# Altium PCB main_board.PcbDoc
Units mm, origin at the board's own origin, x right, y up, seen from the top; angles counter-clockwise.
Board outline 80.01 x 52.07 mm, 2 copper layers (Top Layer, Bottom Layer), stack 1.65 mm thick; 19 components, 14 nets, 64 pads, 2 vias.
Unrouted connection lines stored in the file: 2.
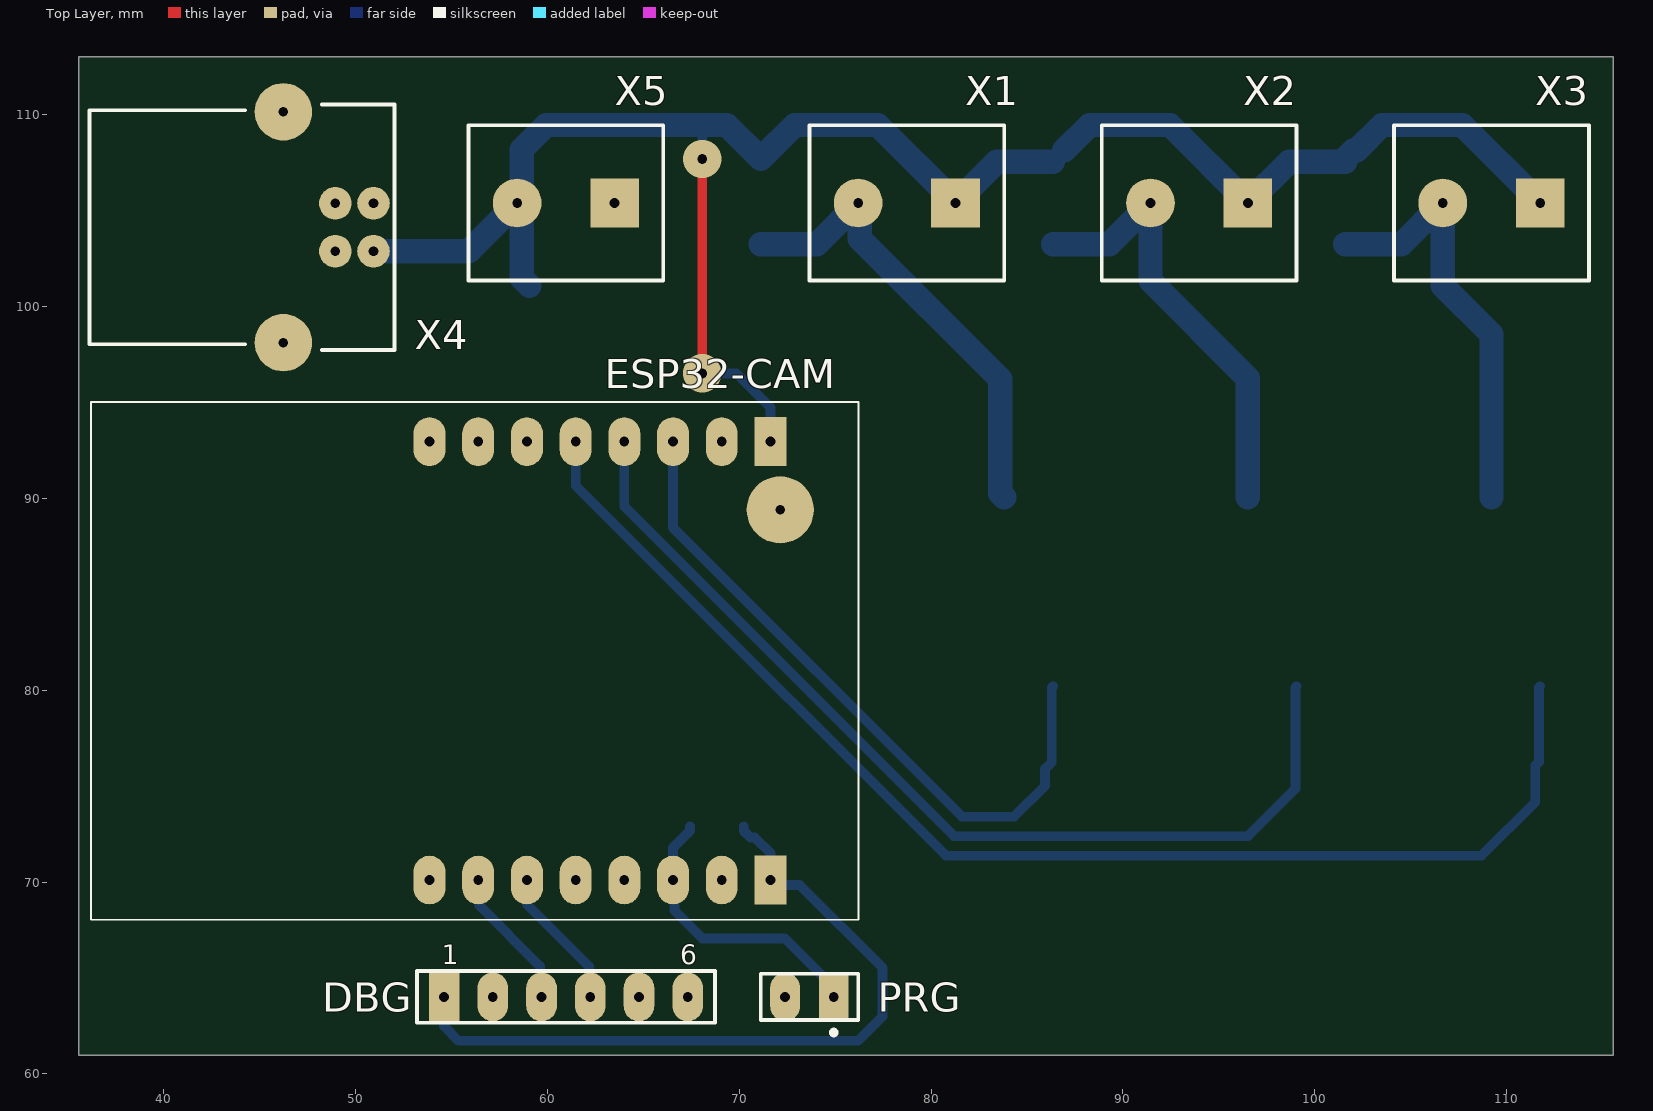
[diagram p0: Top Layer view]
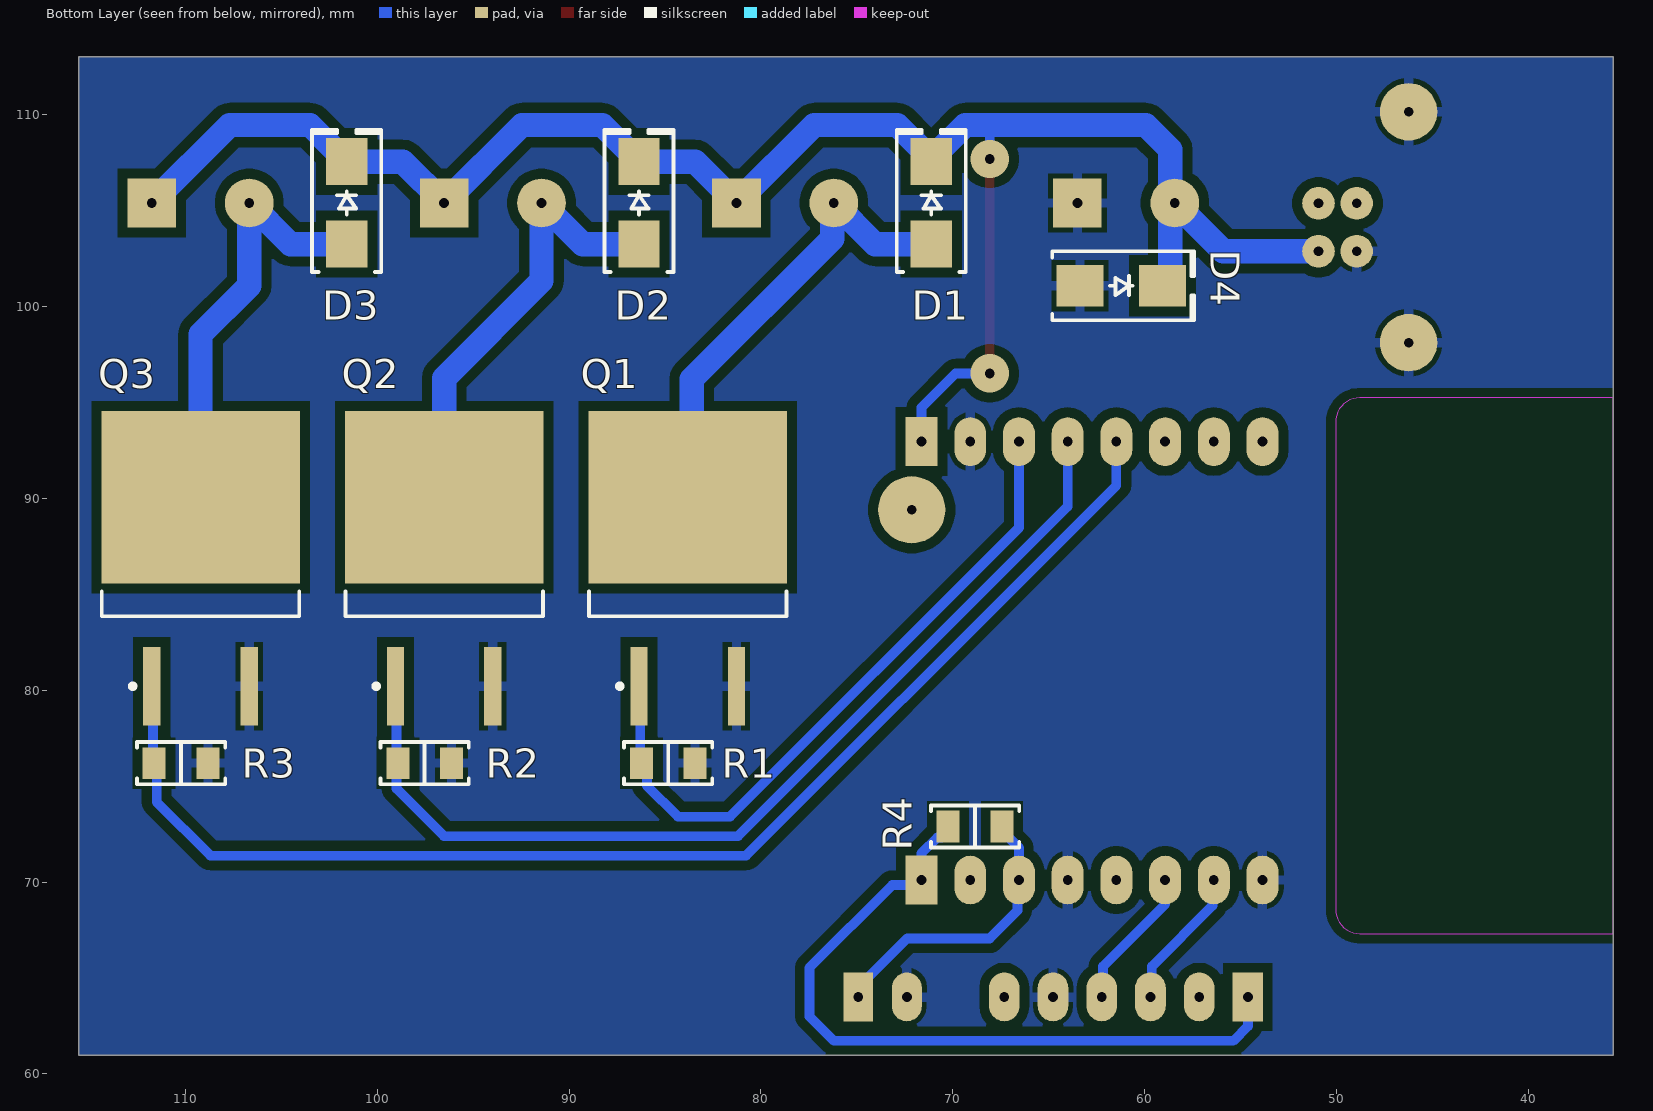
[diagram p1: Bottom Layer view, seen from below]
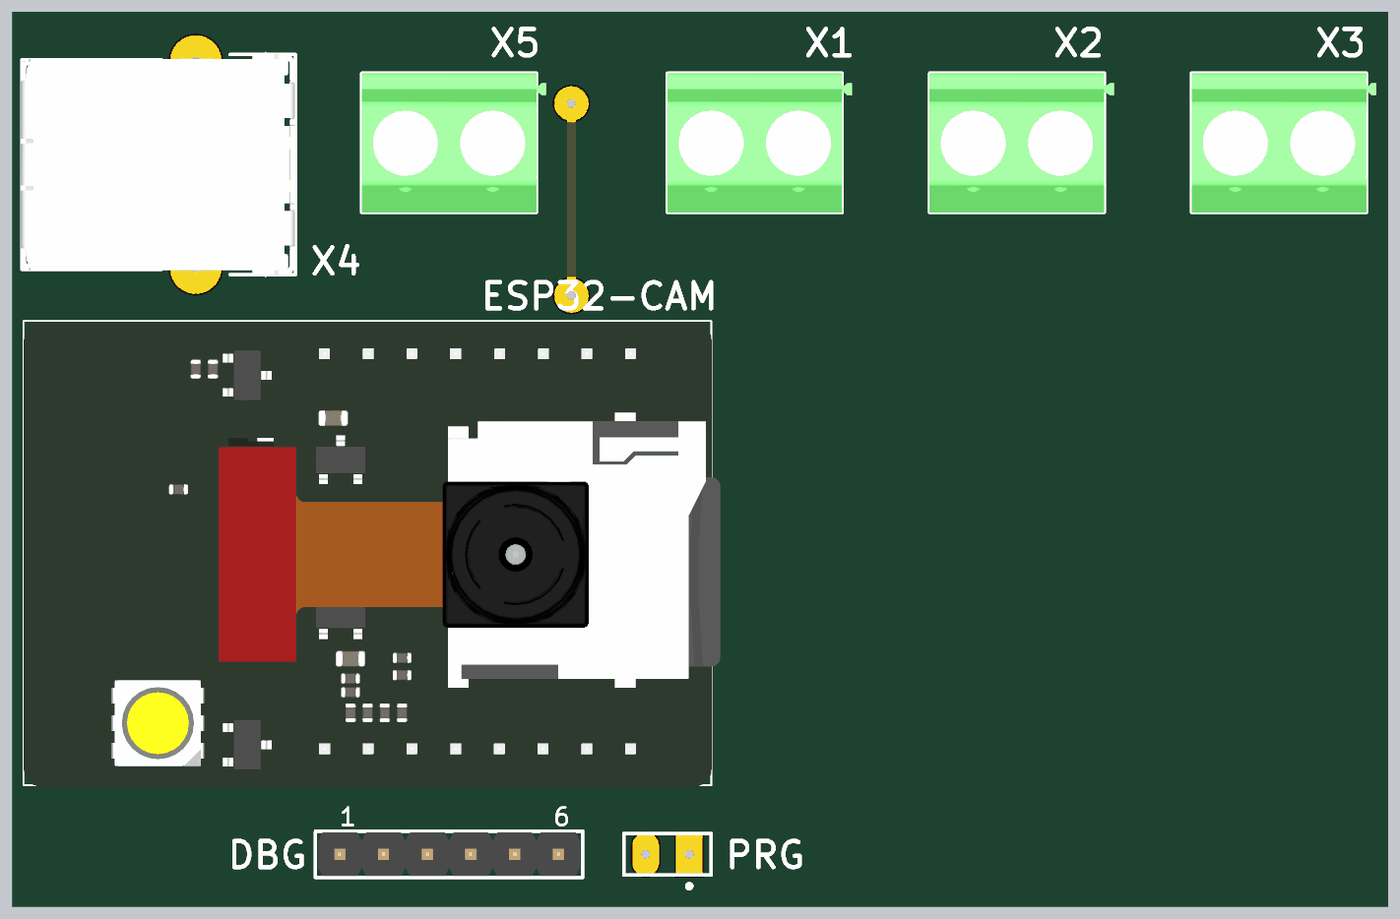
[diagram p2: 3D render of the assembled board from above, using the file's embedded part models]
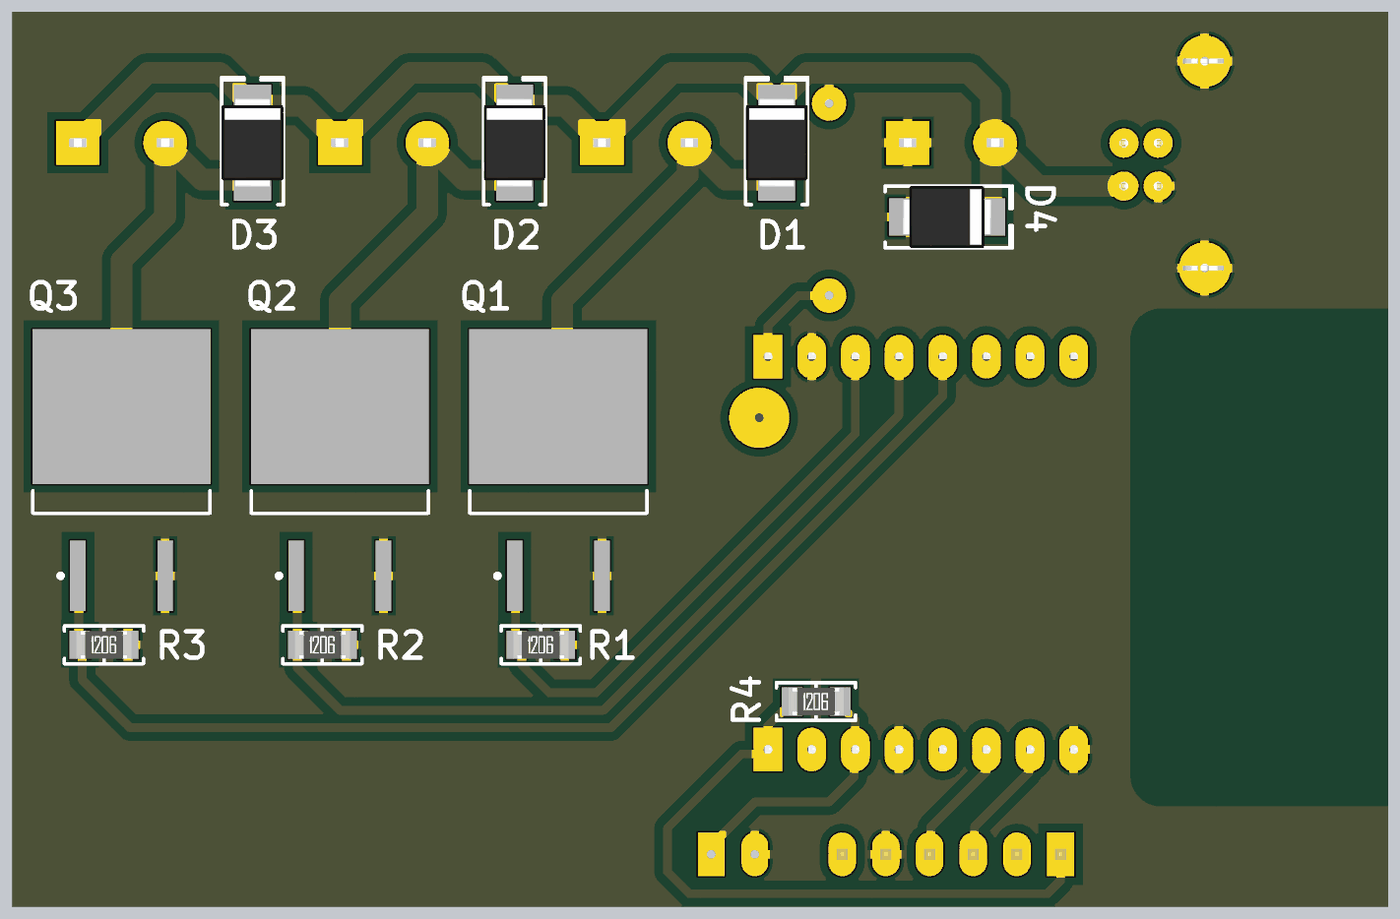
[diagram p3: 3D render of the assembled board from below, using the file's embedded part models]

## Layer stack, top to bottom
Top Solder: solder mask 0.0127, Solder Resist, Dk 3.8
Top Layer: signal copper 0.075
Dielectric: core 1.5, FR-4, Dk 4.5
Bottom Layer: signal copper 0.075
Bottom Solder: solder mask 0.0127, Solder Resist, Dk 3.8

## Board outline
35.56,60.96 115.57,60.96 115.57,113.03 35.56,113.03

## Design rules (kind name [scope] priority, off if disabled: settings)
Clearance [All] p1: gap=0.508 ignorepadtopadclearanceinfootprint=FALSE
PlaneConnect [All] p1: planeconnectstyle=Relief reliefexpansion=0.508 reliefentries=4 reliefconductorwidth=0.508 reliefairgap=0.254
PolygonConnect [All] p1: connectstyle=Relief reliefconductorwidth=0.508 reliefentries=4 polygonreliefangle="90 Angle" airgapwidth=0.254
RoutingVias [All] p1: holewidth=0.711 width=1.27 viastyle="Through Hole" minholewidth=0.711 minwidth=1.27 maxholewidth=0.711 maxwidth=1.27
SolderMaskExpansion [All] p1: expansion=0.102 istentingtop=FALSE
Width [All] p1: maxlimit=1.27 minlimit=0.254 preferedwidth=0.508
29 further rules are at their usual default settings.

## Components (designator, comment, footprint, x,y, rotation, side; value= is the part's Value field where it differs from the comment)
D1 "SK16-LTP" "DO214AA SMB" 71.12,105.41 r90 bottom
D2 "SK16-LTP" "DO214AA SMB" 86.36,105.41 r90 bottom
D3 "SK16-LTP" "DO214AA SMB" 101.6,105.41 r90 bottom
D4 "SK16-LTP" "DO214AA SMB" 61.214,101.092 r180 bottom
DBG "61300611121" 61300611121 60.96,64.008 r0 top
ESP32-CAM "113990580" 113990580 71.628,92.964 r270 top
PRG "68000-102HLF" AMPH-68000-102HLF_V 73.66,64.008 r180 top
Q1 "IPB065N03L G" INF-PG-TO-263-3-2_A_L 83.82,86.36 r90 bottom
Q2 "IPB065N03L G" INF-PG-TO-263-3-2_A_L 96.52,86.36 r90 bottom
Q3 "IPB065N03L G" INF-PG-TO-263-3-2_A_L 109.22,86.36 r90 bottom
R1 "10 kOhms" "RES 1206_3216" 84.836,76.2 r180 bottom
R2 "10 kOhms" "RES 1206_3216" 97.536,76.2 r180 bottom
R3 "10 kOhms" "RES 1206_3216" 110.236,76.2 r180 bottom
R4 "10 kOhms" "RES 1206_3216" 68.834,72.898 r180 bottom
X1 "1729128" PHOE-1729128-2_V 78.74,105.41 r180 top
X2 "1729128" PHOE-1729128-2_V 93.98,105.41 r180 top
X3 "1729128" PHOE-1729128-2_V 109.22,105.41 r180 top
X4 "61729-0010BLF" "FCI USB 61729-0010BLF" 46.228,104.14 r270 top
X5 "1729128" PHOE-1729128-2_V 60.96,105.41 r180 top

## Footprints (in the part's own frame and the unit in brackets; to place one, negate y for a bottom-side part, rotate by r counter-clockwise, add the part's x,y. Pads: shape width x height; smd on the part's side, far side on the other; paste and mask are expansions set on the pad)
113990580 [mm]
  rect 2.54x1.665 hole 0.508: 1(0,0) 9(22.86,0)
  oval 2.54x1.665 hole 0.508: 2(0,-2.54) 3(0,-5.08) 4(0,-7.62) 5(0,-10.16) 6(0,-12.7) 7(0,-15.24) 8(0,-17.78) 10(22.86,-2.54) 11(22.86,-5.08) 12(22.86,-7.62) 13(22.86,-10.16) 14(22.86,-12.7) 15(22.86,-15.24) 16(22.86,-17.78)
  silkscreen extent -2.07,-35.42 24.93,4.58, body extent -1.98,-35.4 25.02,5.1, height 18.07
61300611121 [mm] "Pin Header, pitch 2.54 mm, THT, Vertical, single row, 6p"
  rect 1.6x2.54 hole 0.508: 1(-6.35,0)
  oval 1.6x2.54 hole 0.508: 2(-3.81,0) 3(-1.27,0) 4(1.27,0) 5(3.81,0) 6(6.35,0)
  silkscreen extent -7.77,-1.35 7.77,1.35, body extent -7.62,-1.27 7.62,1.27, height 8.57
AMPH-68000-102HLF_V [mm] "THD, 2-Leads, Body 5.08x2.41mm, Pitch 2.54mm"
  rect 1.55x2.54 hole 0.508: 1(-1.27,0)
  oval 1.55x2.54 hole 0.508: 2(1.27,0)
  silkscreen extent -2.54,-1.2 2.54,1.98, body extent -2.54,-1.2 2.54,1.2, height 8.38
"DO214AA SMB" [mm] "Molded Diode, 2-Leads, Body 4.31x3.62mm, IPC Medium Density"
  rect 2.45x2.15 smd: 1(-2.15,0) 2(2.15,0)
  silkscreen extent -3.6,-1.8 3.8,1.8, body extent -2.6,-1.8 2.6,1.8, height 2.4
"FCI USB 61729-0010BLF" [mm]
  round 1.7 hole 0.508: 1(1.25,4.7) 2(-1.25,4.7) 3(-1.25,2.71) 4(1.25,2.71)
  round 3 hole 0.508: S(-6.02,0) S(6.02,0)
  silkscreen extent -6.4,-10.1 6.4,5.8, body extent -6.56,-10.18 6.56,5.76, height 11
INF-PG-TO-263-3-2_A_L [mm] "DPAK, 3-Leads, Body 10.06x8.98mm, Pitch 2.54mm, IPC High Density"
  rect 4.1x0.9 smd: 1(-6.15,2.54) 3(-6.15,-2.54)
  rect 9x10.35 smd: 2(3.7,0)
  silkscreen extent -6.27,-5.15 -1.2,5.15, body extent -2.5,-5.15 6.95,5.15, height 4.57
PHOE-1729128-2_V [mil] "Receptacle, 2-Leads, Body 8.1x10.16mm, Pitch 5.08mm"
  rect 100x100 hole 20: 1(-100,0)
  round 100 hole 20: 2(100,0)
  silkscreen extent -200,-159 200,159, body extent -222,-159 200,159, height 394
"RES 1206_3216" [mm] "Chip Resistor, 2-Leads, Body 3.13x1.55mm, IPC Medium Density"
  rect 1.2x1.65 smd: 1(-1.4,0) 2(1.4,0)
  silkscreen extent -2.3,-1.1 2.3,1.1, body extent -1.6,-0.8 1.6,0.8, height 0.6

## Part data
D1 D2 D3 D4: "DIODE SCHOTTKY 60V 1A DO214AA", Current - Average Rectified (Io)=1A, Current - Reverse Leakage @ Vr="500µA @ 60V", Manufacturer="Micro Commercial Co", Operating Temperature - Junction="-55°C ~ 125°C", Package / Case="DO-214AA, SMB", Supplier Device Package="DO-214AA (SMB)", Supplier Part Number 1=SK16-LTPMSCT-ND, Voltage - DC Reverse (Vr) (Max)=60V, Voltage - Forward (Vf) (Max) @ If="720mV @ 1A", ComponentLink1Description=Datasheet, ComponentLink1URL=https://www.mccsemi.com/pdf/Products/SK12-L~SK110-L(DO-214AA)-V1.pdf, ComponentLink2Description="DigiKey Link", ComponentLink2URL=http://digikey.com/product-detail/en/micro-commercial-co/SK16-LTP/SK16-LTPMSCT-ND/2642064, Diode Type=Schottky, LastUpdated="2.9.2020. 01:18:51", Lifecycle Status=Active, Minimum Order=1, Mounting Type="Surface Mount", Packaging=TapeAndReel, Part Number=SK16-LTP, Part Status=Active, PartId=1607, Price=0.07, Series=-, Speed="Fast Recovery =< 500ns, > 200mA (Io)", Supplier 1=DigiKey
DBG: library part CMP-1502-01070-1, "THT Vertical Pin Header WR-PHD, Pitch 2.54 mm, Single Row, 6 pins", Contact Resistance=20mOhm, Manufacturer="Wurth Elektronik", Operating Temperature=-40to105degC, Rated Current=3A, Withstanding Voltage=500VAC, Working Voltage=250VAC, Datasheet URL=https://katalog.we-online.de/em/datasheet/6130xx11121.pdf, Gender=Male, Manufacturer URL=http://www.we-online.de, Mounting Technology=THT, Orientation=Vertical, Package Reference=61300611121, Packaging=Bag, Part Number=61300611121, Pin Number=6, Pitch=2.54mm, Publisher=WurthElektronik, Row Number=Single
ESP32-CAM: "Integrated Circuit", Manufacturer_Name="Seeed Studio", Mouser Part Number=713-113990580, Arrow Part Number=113990580, Arrow Price/Stock=https://www.arrow.com/en/products/113990580/seeed-technology-limited, Datasheet Link=https://github.com/SeeedDocument/Outsourcing/raw/master/113990580%20ESP32-CAM/113990580%20ESP32-CAM%20Product%20Specification.pdf, Height=3mm, Manufacturer_Part_Number=113990580, Mouser Price/Stock=https://www.mouser.com/Search/Refine.aspx?Keyword=713-113990580
PRG: library part CMP-2000-05666-1, "Male Header, Pitch 2.54 mm, 1 x 2 Position, Height 8.38 mm, Tail Length 2.41 mm, RoHS, Bulk", Current Rating=3A, Flammability Rating=UL94V-0, Insulation Resistance=5000MOhms, Manufacturer=FCI, Operating Temperature Range=-65Cto+125C, Package Description="Male Header, Pitch 2.54 mm, 1 x 2 Position, Height 8.38 mm, Tail Length 2.41 mm", Voltage Rating=1.5kV, Brand=FCI, Contact Gender=Pin(Male), Contact Material=PhosphorBronze, Contact Plating=Gold/GTX, Datasheet URL=https://datasheet.ciiva.com/5149/68000-274228-5149165.pdf, Datasheet Version="Rev. F, 04/2006", Factory Pack Quantity=100, Housing Material=Thermoplastic, Manufacturer URL=http://www.amphenol.com/, Mating Post Length=5.84mm, Mounting Angle=Vertical, Mounting Style=ThroughHole, Mounting Technology=ThroughHole, Number of Positions=2, Number of Positions / Contacts=2, Number of Rows=1, Package Reference=68000-102HLF, Packaging=Bulk, Pitch=2.54mm, Product Category=Headers&WireHousings, Product Type=Headers, RoHS=Details, Series=68000, Termination Post Length=2.41mm, Termination Style=ThroughHole, Type=Unshrouded
Q1 Q2 Q3: library part CMP-1090-00112-1, "N-Channel OptiMOS 3 Power-Transistor, 30 V VDS, 50 A ID, -55 to 175 degC, PG-TO-263-3-2, Reel, Green", Manufacturer=Infineon, ComponentLink1Description="Manufacturer URL", ComponentLink1URL=http://www.infineon.com/, ComponentLink2Description=Datasheet, ComponentLink2URL=http://www.infineon.com/dgdl/IPP065N03L_rev2.pdf?folderId=db3a30431441fb5d01148c401f250e27&fileId=db3a30431441fb5d011492371ebc0fe2, ComponentLink3Description="Package Specification", ComponentLink3URL=http://www.infineon.com/dgdl/IPB026N06N_Rev2.2.pdf?folderId=db3a304313b8b5a60113cee8763b02d7&fileId=db3a3043372d5cc8013754c7b2a74f7c, DatasheetVersion="Rev. 2.0", Green=TRUE, Halogen-free=TRUE, ID (max)="50Â A", IDpuls (max)="350Â A", Mounting Technology="Surface Mount", PackageDescription="3-Pin Plastic (Green) Transistor Single Outline Package, 10.06 x 8.98 mm Body, 2.54 mm Pitch", PackageReference=PG-TO-263-3-2, PackageVersion="Rev. 01, 08/2007", Packing=Reel, PartNumber="IPB065N03L G", Polarity=N, Ptot (max)="56Â W", QG="23Â nC", RDS (on) (max)="6.5Â mOhm", RDS (on) (max) (@4.5V)="9.5Â mOhm", Rth="2.7Â K/W", RthJA (max)="62Â K/W", RthJC (max)="2.7Â K/W", VDS (max)="30Â V", VGS(th) (max)="2.2Â V", VGS(th) (min)="1Â V"
R1 R2 R3 R4: library part CRG1206F10K, "RES SMD 10K OHM 1% 1/4W 1206", Device Package="1206 (3216 Metric)", Manufacturer="TE Connectivity Passive Product", Operating Temperature="-55°C ~ 155°C", Power (Watts)="0.25W, 1/4W", Supplier Device Package=1206, Supplier Part Number 1=A106069CT-ND, Temperature Coefficient=±100ppm/°C, Tolerance=±1%, ComponentLink1Description=Datasheet, ComponentLink1URL=https://www.te.com/commerce/DocumentDelivery/DDEController?Action=srchrtrv&DocNm=1773204&DocType=DS&DocLang=English, ComponentLink2Description="DigiKey Link", ComponentLink2URL=http://digikey.com/product-detail/en/te-connectivity-passive-product/CRG1206F10K/A106069CT-ND/3477720, Composition="Thick Film", Height - Seated (Max)="0.026\" (0.65mm)", LastUpdated="2.9.2020. 01:13:10", Lifecycle Status=Active, Minimum Order=1, Number of Terminations=2, Package / Case="1206 (3216 Metric)", Packaging=TapeAndReel, Part Number=CRG1206F10K, Part Status=Active, PartId=26989, Price=0.01, Resistance="10 kOhms", Series="CRG, Neohm", Size / Dimension="0.122\" L x 0.061\" W (3.10mm x 1.55mm)", Supplier 1=DigiKey
X1 X2 X3 X5: library part CMP-2000-05815-1, "PCB Terminal Block, 13.5 A, 400 V, 2-Pin THD, RoHS, Bulk", Current Rating=13500mA, Manufacturer="Phoenix Contact", Package Description="2-Pin Through Hole Device, Body 8.1 x 10.16 mm, Pitch 5.08 mm", Package Reference=1729128-2, Package Version=03/2015, Voltage Rating=400V, Datasheet URL=https://datasheet.ciiva.com/16046/1729128-16046181.pdf, Datasheet Version=12/2013, Manufacturer URL=http://www.phoenixcontact.com/, Mounting Technology=ThroughHole, No. of Positions=2, No. of Rows=1, Orientation=Horizontal, Package URL=https://www.phoenixcontact.com/online/portal/pi/pxc/product_detail_page/!ut/p/b1/3VdJjqNKFDxLH8AFycySyWY2ozFsEPOMMQaDOX1XedGL_1Vdm5YXJleknhSKeBkvI6EA8ncAo3AYoDhBQGco6KN7VURTdemj9us_IEKEZo_YHiPAEWEFmDGOHMORkqKYCORBZxgL7ZoaZYcbFFUZ3fqxSY6GOuxydWUuHqz1ynmMFygu583Bob0Ewr6Sd_l-5m-kAueHiB0jpRwZwe58wwtkpxtMYd_LmGcDRU02dRNEyWt6Y2ti5pSyJ_reIkzIulrqApdnbT11V5jnCKbYNCvhEM1MCpPByat_X379-iThf08CI5GfOPqfBeS3BRoBOdD55AKVv0iLwCMq-2BrzXWSGRH7pUGD9uwXQjiph3xL0DKQwdGa0JImiIOmBNOestqgwTHSSs2oOep-78apyXQBvNi8ZLaFjvjWvcaUEBu0MC6Wbe-d6mB0FAebo2lUWinqYaZs5DAYzV0RP9yitUjnGJ0iI9xhZkT42OCQNUJJhkgWINNQLP2JFP6OpMg3JCVg70jqHT0lvKOnhHf0lPuOnnLf0VPuWx6_dxwUIvwk5WMkT0kLL1mh61l2yZVSzG3pYV_bqo-mj6uMKwKwdnnW8Jh5RTOJzMOA5c-eJDaZQw4mTMPH02PvS_ZAqNVjVTo2WyYLkwH_KU1mmmG5kjRhDqPXLwwVHvVOjCM60-fpXvTDfMGW1PVFVS1r4e4yVDk4ZdNbkUHvqPqQSeian4UD39fNKmachqdJ1NJbyk8rXT9mXTvPk3oE5meulKGgiruPJek-4I9hTT6G8ZLOyRSm2RRVbThERQad5OS28hdt4YW4vG0stgYYzsWsK4_7y6DZMjJSCqri1kyiZR5vD7pwIrNR7QwPHTcLTI5qT7eRlpHrdGiupYlqQDJ7zy_CND8fWWBoLRXxk1RVcXiBQwbTD4Xi7KL-FuO94t9xaqweXzH, Packing=Bulk, PartNumber=1729128, Pitch=5.08mm, RoHS=TRUE
X4: "CONN RCPT USB2.0 TYPEB 4POS R/A", Current Rating (Amps)=1A, Manufacturer="Amphenol ICC (FCI)", Operating Temperature="-55°C ~ 85°C", Supplier Part Number 1=609-1039-ND, ComponentLink1Description=Datasheet, ComponentLink1URL=http://www.amphenol-icc.com/media/wysiwyg/files/drawing/61729.pdf, ComponentLink2Description="DigiKey Link", ComponentLink2URL=//digikey.com/product-detail/en/amphenol-icc-fci/61729-0010BLF/609-1039-ND/1001353, Connector Type="USB - B", Features="Board Lock", Gender=Receptacle, LastUpdated="9.12.2019. 20:53:17", Lifecycle Status=0, Mating Cycles=1500, Minimum Order=1, Mounting Feature=Horizontal, Mounting Type="Through Hole, Right Angle", Number of Contacts=4, Number of Ports=1, Packaging=Tube, Part Number=61729-0010BLF, Part Status=Active, Price=0.99, Series=61729, Shielding=Shielded, Specifications="USB 2.0", Supplier 1=DigiKey, Termination=Solder

## Free pads (board coordinates)
  round 3.5 hole 0.508: 23(72.136,89.408)

## Via types
v1: diameter 2, hole 0.508, Top Layer to Bottom Layer, 2 vias

## Nets (pads, with @x,y where several pads share a name; then routed paths per layer and width w, separated by ;. In a path a pad name is that pad's centre, name@x,y a point inside that pad or via, vN(x,y) a via of type N, cw(c..) or ccw(c..) an arc to the next point about the centre after c; other vN are vias at no path point)
+3V3: DBG.1 ESP32-CAM.9 R4.1 | length 39
  Bottom Layer w0.508: DBG.1 54.61,62.484 55.372,61.722 76.2,61.722 77.47,62.992 77.47,65.532 73.152,69.85 71.882,69.85 ESP32-CAM.9 71.628,71.504 70.805,72.327 70.58,72.327 70.234,72.673 R4.1
+5V: D1.2 D2.2 D3.2 D4.2 ESP32-CAM.1 X1.1 X2.1 X3.1 X4.1 X5.2 | length 98.1
  Top Layer w0.508: v1(68.072,96.52) v1(68.072,107.696)
  Bottom Layer w0.508: D4.2@58.928,100.956 D4.2 ; v1(68.072,96.52) 69.85,96.52 71.628,94.742 ESP32-CAM.1 ; v1(68.072,107.696) 68.072,109.474
  Bottom Layer w1.27: X4.1 55.9,102.89 X5.2 X5.2@58.663,105.653 ; D4.2 58.663,101.493 X5.2@58.663,105.653 ; D2.2 83.43,107.56 X1.1 77.216,109.474 72.884,109.474 71.12,107.71 69.356,109.474 68.072,109.474 59.944,109.474 58.663,108.193 X5.2@58.663,105.653 ; D2.2@86.95,108.15 88.274,109.474 92.456,109.474 X2.1 98.67,107.56 D3.2 101.6,107.71 102.04,108.15 102.19,108.15 103.514,109.474 107.696,109.474 X3.1
+5V_PG: DBG.6
DTR: DBG.2
GND: D4.1 DBG.5 ESP32-CAM.2 ESP32-CAM.12 ESP32-CAM.16 PRG.2 Q1.3 Q2.3 Q3.3 R1.2 R2.2 R3.2 X4.4 X4.S X5.1
NetD1_1: D1.1 Q1.2 X1.2 | length 24.5
  Bottom Layer w1.27: D1.1 74.05,103.26 X1.2 76.286,105.324 76.286,103.546 83.603,96.229 83.603,90.277 Q1.2
NetD2_1: D2.1 Q2.2 X2.2 | length 23.4
  Bottom Layer w1.27: D2.1 89.29,103.26 X2.2 91.44,101.346 96.52,96.266 Q2.2
NetD3_1: D3.1 Q3.2 X3.2 | length 22.4
  Bottom Layer w1.27: D3.1 104.53,103.26 X3.2 106.68,101.092 109.22,98.552 Q3.2
NetESP32-CAM_11: ESP32-CAM.11 PRG.1 R4.2 | length 15.3
  Bottom Layer w0.508: R4.2 67.434,72.673 66.548,71.787 ESP32-CAM.11 66.619,70.033 66.619,68.509 68.072,67.056 72.377,67.056 74.93,64.503 PRG.1
PUMP1: ESP32-CAM.3 Q1.1 R1.1 | length 36.2
  Bottom Layer w0.508: ESP32-CAM.3 66.548,88.472 81.614,73.406 84.328,73.406 85.936,75.014 85.936,75.9 86.298,76.262 86.298,80.148 Q1.1
PUMP2: ESP32-CAM.4 Q2.1 R2.1 | length 51.9
  Bottom Layer w0.508: ESP32-CAM.4 64.008,89.575 81.193,72.39 96.52,72.39 98.998,74.868 98.998,76.2 98.998,80.148 Q2.1
PUMP3: ESP32-CAM.5 Q3.1 R3.1 | length 67.6
  Bottom Layer w0.508: ESP32-CAM.5 61.468,90.678 64.516,87.63 80.772,71.374 108.712,71.374 111.506,74.168 111.506,76.07 R3.1 111.698,76.262 111.698,80.148 Q3.1
RXI: DBG.3 ESP32-CAM.15 | length 7.5
  Bottom Layer w0.508: ESP32-CAM.15 56.459,70.033 56.459,68.763 59.621,65.601 59.621,64.077 DBG.3
TXO: DBG.4 ESP32-CAM.14 | length 7.5
  Bottom Layer w0.508: ESP32-CAM.14 58.928,68.834 62.16,65.601 62.16,64.078 DBG.4
pads on no net: ESP32-CAM.6 ESP32-CAM.7 ESP32-CAM.8 ESP32-CAM.10 ESP32-CAM.13 X4.2 X4.3

## Polygon pours and split planes (outlines as drawn)
GND on Bottom Layer "GND_L02_P000" (solid, remove dead copper, pour order 0): 35.56,113.03 35.56,60.96 115.57,60.96 115.57,113.03

## Keep-outs
Bottom Layer:
  region: 35.56,95.25 48.768,95.25 cw(c48.768,93.98) 50.038,93.98 50.038,68.58 cw(c48.768,68.58) 48.768,67.31 35.56,67.31

## Text inside footprints (layer, text, board x,y; h text height)
DBG: Top Overlay "1" at 54.49,65.708 h1.02; Top Overlay "6" at 66.93,65.708 h1.02